# EAGLE board untitled (EAGLE 6.4)
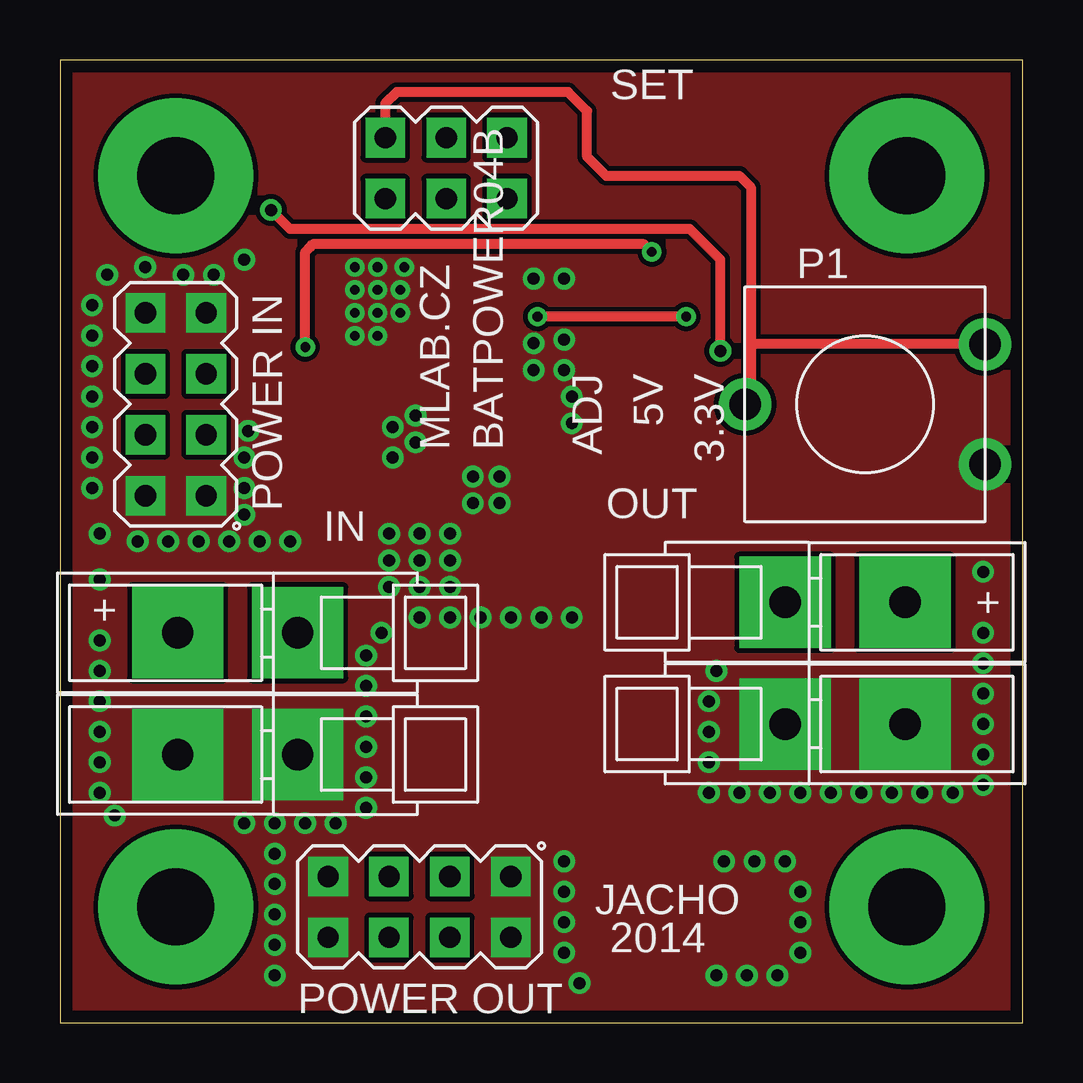
[diagram p0: board, top side]
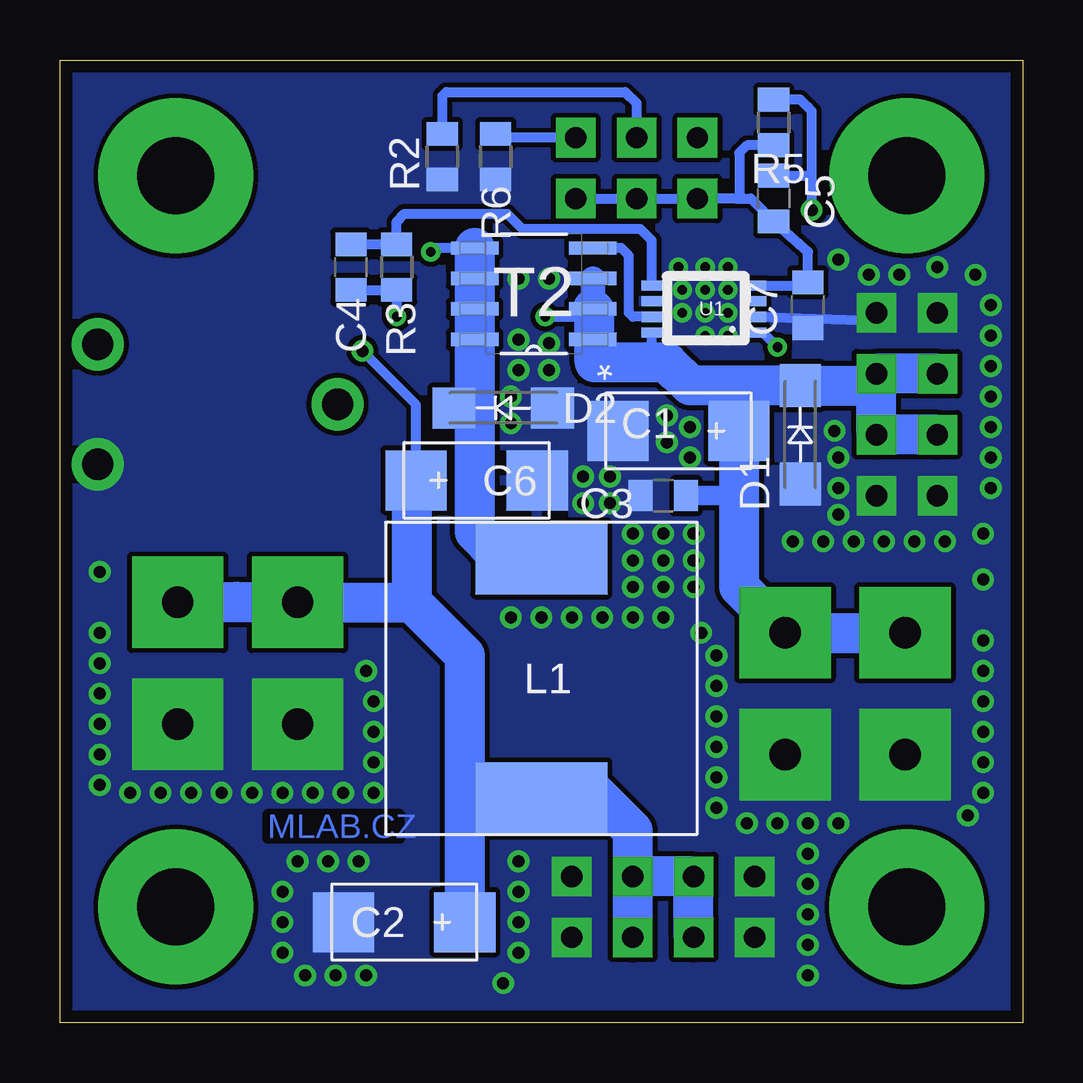
[diagram p1: board, bottom side, seen from below]

Size 40.13 x 40.13 mm. Coordinates in mm from the lower left corner, seen from the top.
Outline: 0,0 40.13,0 40.13,40.13 0,40.13 0,0
Copper layers (1*16): Top 0.035mm / dielectric 1.5mm / Bottom 0.035mm
Design rules "jacho35": minimum track width 8mil, minimum drill 16mil, track to track 8mil, track to pad 8mil, pad to pad 8mil, via to via 8mil, smd to smd 8mil, copper to edge 20mil, drill to drill 8mil, minimum pad ring 10mil, minimum via ring 8mil, stop-mask expansion 4mil, vias tented up to drill 25mil, thermal gap 0mil

## Footprints (pad centres in the part's own frame; a part is rotated, then mirrored left to right if it is on the bottom)
C = smd 2.55 x 2.5: + 2.525,0; - -2.525,0
C0805 = smd 0.991 x 1.295: 1 -0.95,0; 2 0.95,0
SMA = smd 1.8 x 1.7: A -2.05,0; K 2.05,0
DE1205-10 = smd 3 x 5.5: P$1 -5,0; P$2 5,0
TRIM_CA9MTV10 = drill 1.3 pad 2.184: 1 -2.5,-5; 2 0,5; 3 2.5,-5
0805 = smd 0.991 x 1.295: 1 -0.95,0; 2 0.95,0
MA04-2 = drill 0.889 pad 1.651 square: 1 -3.81,-1.27; 2 -3.81,1.27; 3 -1.27,-1.27; 4 -1.27,1.27; 5 1.27,-1.27; 6 1.27,1.27; 7 3.81,-1.27; 8 3.81,1.27
WAGO256 = drill 1.3 pad 3.81 square: 1 2.54,0; A1 -2.46,0
MA03-2 = drill 0.889 pad 1.651 square: 1 -2.54,-1.27; 2 -2.54,1.27; 3 0,-1.27; 4 0,1.27; 5 2.54,-1.27; 6 2.54,1.27
SO8 = smd 1.981 x 0.559: 1 -2.464,1.905; 2 -2.464,0.635; 3 -2.464,-0.635; 4 -2.464,-1.905; 5 2.464,-1.905; 6 2.464,-0.635; 7 2.464,0.635; 8 2.464,1.905
MSOP-8 = smd 0.42 x 0.89: 1 -0.975,-1.95; 2 -0.325,-1.95; 3 0.325,-1.95; 4 0.975,-1.95; 5 0.975,2.375; 6 0.325,2.375; 7 -0.325,2.375; 8 -0.975,2.375
SROUB3M = drill 3.2 pad 6.452: P$1 0,0

## Placement (x,y rotation side)
C1  47u  [C]  14.35,24.67 0 bottom
C2  100u  [C]  25.78,4.19 0 bottom
C3  100n  [C0805]  14.99,21.97 0 bottom
C4  1n  [C0805]  28,31.5 270 bottom
C5  100p  [C0805]  10.38,34.35 90 bottom
C6  100u  [C]  22.76,22.61 180 bottom
C7  470p  [C0805]  8.95,29.91 90 bottom
D1  M4  [SMA]  9.27,24.51 90 bottom
D2  15MQ040N  [SMA]  21.65,25.62 180 bottom
L1  22u  [DE1205-10]  20.07,14.35 270 bottom
P1  [TRIM_CA9MTV10]  33.56,25.78 90 top
R2  20k  [0805]  24.19,36.1 90 bottom
R3  22k  [0805]  26.1,31.5 270 bottom
R5  33k  [0805]  10.38,37.53 90 bottom
R6  20k  [0805]  21.97,36.1 90 bottom
SV1  [MA04-2]  4.83,25.78 90 top
SV2  [MA04-2]  14.99,4.83 180 top
SV3  [WAGO256]  7.37,11.18 0 top
SV4  [WAGO256]  7.37,16.26 0 top
SV5  [WAGO256]  32.77,12.45 180 top
SV6  [WAGO256]  32.77,17.53 180 top
SW2  [MA03-2]  16.1,35.62 0 top
T2  IRF7416  [SO8]  20.38,30.38 180 bottom
U1  LM3485  [MSOP-8]  13.08,29.75 90 bottom
X1  SROUB3M  [SROUB3M]  4.83,4.83 0 top
X2  SROUB3M  [SROUB3M]  35.31,4.83 0 top
X3  SROUB3M  [SROUB3M]  4.83,35.31 0 top
X4  SROUB3M  [SROUB3M]  35.31,35.31 0 top

## Library data of the parts
C1-C7 = moje_C
D1 X1-X4 = moje
D2 = moje_diody
L1 = moje_L
P1 = moje_pot
R2 R3 R5 R6 = moje_R
SV1 SV2 = moje_hrebinky; OC_FARNELL: unknown; OC_NEWARK: unknown
SV3-SV6 = moje_konektory
SW2 = moje_hrebinky
T2 = moje_T
U1 = ciza_io

## Nets
GND: C1.- C2.- C3.1 C6.- C7.1 D1.A D2.A P1.1 R2.1 R6.1 SV1.1 SV1.2 SV1.7 SV1.8 SV2.1 SV2.2 SV2.7 SV2.8 SV3.1 SV3.A1 SV5.1 SV5.A1 U1.2 U1.6
N$1: T2.4 U1.7
N$2: C1.+ C3.2 C4.2 D1.K R3.2 SV1.3 SV1.4 SV1.5 SV1.6 SV4.1 SV4.A1 T2.1 T2.2 T2.3 U1.8
N$3: C5.1 C7.2 R5.1 SW2.1 SW2.3 SW2.5 U1.4
N$4: C4.1 R3.1 U1.5
N$5: C2.+ C5.2 C6.+ L1.P$2 R5.2 SV2.3 SV2.4 SV2.5 SV2.6 SV6.1 SV6.A1
N$6: D2.K L1.P$1 T2.5 T2.6 T2.7 T2.8 U1.1
N$10: R2.2 SW2.4
N$11: R6.2 SW2.6
N$12: P1.2 P1.3 SW2.2

## Tracks (layer width: path | path; a pad name or v marks a point on that pad's centre or on a via)
GND  (via drill 0.4, 0.5)
  Bottom 0.406: U1.2 6.1,29.27 SV1.7
  other vias: 21.02,31.02 6.41,31.18 7.68,31.81 5.14,31.18 1.33,28.64 38.48,18.8 38.48,16.26 38.48,14.99 38.48,13.72 38.48,12.45 38.48,11.18 38.48,9.91 37.21,9.59 35.94,9.59 34.67,9.59 33.4,9.59 32.13,9.59 30.86,9.59 29.59,9.59 28.32,9.59 27.05,9.59 27.05,10.86 27.05,12.13 27.05,13.4 27.37,14.67 1.65,18.48 1.65,15.94 1.65,14.67 1.65,13.4 1.65,12.13 1.65,10.86 1.65,9.59 2.29,8.64 7.68,8.32 8.95,8.32 10.22,8.32 11.49,8.32 12.76,8.95 12.76,10.22 12.76,11.49 12.76,12.76 12.76,14.03 12.76,15.3 13.4,16.26 16.26,16.89 17.53,16.89 18.8,16.89 20.07,16.89 21.34,16.89 14.99,16.89 3.24,20.07 4.51,20.07 5.78,20.07 7.05,20.07 8.32,20.07 9.59,20.07 17.21,22.76 13.87,24.83 13.87,23.56 13.72,20.38 14.99,20.38 16.26,20.38 3.56,31.5 1.97,31.18 1.33,29.91 8.95,7.05 8.95,5.78 8.95,4.51 8.95,3.24 8.95,1.97 21.02,6.73 27.69,6.73 28.96,6.73 30.23,6.73 30.86,5.46 30.86,4.19 30.86,2.92 29.91,1.97 28.64,1.97 27.37,1.97 19.75,27.21 21.02,27.21 17.21,21.65 21.02,28.48 1.65,20.38 1.33,27.37 1.33,26.1 1.33,24.83 1.33,23.56 1.33,22.29 21.02,5.46 21.02,4.19 21.02,2.92 21.65,1.65 19.75,31.02 19.75,28.32 13.72,19.27 14.99,19.27 16.26,19.27 13.72,18.16 14.99,18.16 16.26,18.16 7.84,24.67 7.68,23.56 7.68,22.29 7.68,21.18 14.19,29.59 12.29,31.5 13.24,31.5 14.35,31.5 14.19,30.54 12.29,30.54 13.24,30.54 12.29,29.59 13.24,29.59 14.83,25.3 14.83,24.19 18.32,22.76 18.32,21.65 21.34,26.1 21.34,24.99 12.29,28.64 13.24,28.64
  pour Bottom: -0.25,40.39 40.39,40.39 40.39,-0.25 -0.25,-0.25
  pour Top: 0.38,40.39 0.38,-0.25 40.39,-0.25 40.39,39.75
N$1
  Bottom 0.406: U1.7 16.25,29.42 16.41,29.59 16.41,31.97 16.73,32.29 T2.4
N$2  (via drill 0.4)
  Top 0.406: v26.1,29.43 v19.91,29.43
  Bottom 0.406: C1.+ 11.83,26.55 11.81,26.56 | 15.28,28.77 U1.8 15.46,27.37 | C4.2 R3.2 v26.1,29.43 | v19.91,29.43 18.24,29.43 T2.2
  Bottom 0.61: 11.81,26.56 11.83,26.55 | 9.91,26.56 13.72,26.72 14.81,26.72 15.46,27.37
  Bottom 0.813: C3.2 11.83,21.97
  Bottom 1.016: T2.2 T2.3
  Bottom 1.676: SV1.6 SV1.5 6.1,26.42 | SV1.4 SV1.3 6.1,26.42 | 6.1,26.42 6.24,26.56 D1.K 9.91,26.56 11.18,26.56 11.81,26.56 12.45,26.56 13.86,26.56 14.83,27.53 17.84,27.53 | C1.+ 11.83,21.97 11.83,18.81 11.83,18.18 SV4.1 SV4.A1 | 17.84,27.53 17.84,29.67 T2.2 | 17.84,27.53 17.84,28.4 T2.1
N$3
  Bottom 0.406: U1.4 9.56,30.72 C7.2 8.95,32.13 C5.1 11.33,34.35 11.65,34.35 | SW2.5 SW2.3 SW2.1 11.97,34.35 11.65,34.35 | R5.1 11.49,36.58 11.81,36.26 11.81,34.51 11.65,34.35
N$4
  Bottom 0.406: U1.5 15.46,32.6 15.94,33.08 20.86,33.08 21.49,33.72 25.78,33.72 26.1,33.4 R3.1 C4.1
N$5  (via drill 0.5)
  Top 0.406: v27.53,28 27.53,31.81 26.26,33.08 9.59,33.08 v8.79,33.88
  Bottom 0.406: C5.2 9.27,35.3 8.8,35.3 8.79,35.31 | 8.95,38.16 9.27,38.48 | 9.27,38.48 R5.2 | C6.+ 25.29,25.77 v27.53,28 | v8.79,33.88 8.79,35.31 | 8.79,35.31 8.79,38.01 9.27,38.48
  Bottom 1.676: C2.+ 23.26,9.91 | 23.26,9.91 23.26,11.19 23.26,13.73 23.26,15.32 25.22,17.29 | SV2.6 SV2.5 SV2.3 | SV2.4 SV2.3 | SV2.3 16.26,8 18.16,9.91 18.8,9.91 19.43,9.27 19.99,9.27 L1.P$2 22.7,9.35 23.26,9.91 | SV6.1 30.86,17.53 | 30.86,17.53 SV6.1 | 30.86,17.53 32.77,17.53 | 32.77,17.53 SV6.A1 | 32.78,17.54 32.77,17.53 | 30.88,17.54 30.86,17.53 | 25.22,17.29 25.46,17.53 | 25.46,17.53 25.46,22.46 C6.+ | SV6.1 25.46,17.53 | 25.46,17.53 25.22,17.29
N$6  (via drill 0.4)
  Top 0.406: v10.22,28.16 10.22,32.13 10.38,32.29 10.54,32.45 24.35,32.45 v24.67,32.13
  Bottom 0.406: U1.1 11,28.77 10.84,28.77 v10.22,28.16 | T2.5 23.01,32.29 24.51,32.29 v24.67,32.13
  Bottom 1.676: T2.5 T2.6 T2.7 T2.8 22.85,25.62 | 22.85,25.62 22.85,20.47 21.97,19.59 20.3,19.59 L1.P$1 | D2.K 22.85,25.62
N$10
  Bottom 0.406: R2.2 24.19,38.64 24.04,38.8 16.57,38.8 16.1,38.32 SW2.4
N$11
  Bottom 0.406: SW2.6 21.81,36.89 R6.2
N$12
  Top 0.406: 28.8,28.16 28.8,34.83 28.32,35.31 22.76,35.31 21.97,36.1 21.97,38.01 21.18,38.8 14.03,38.8 13.56,38.32 SW2.2 | 28.8,28.16 28.8,26.02 P1.2 | P1.3 28.92,28.28 28.8,28.16

## Text on the board
Bottom: MLAB.CZ
tPlace: SET | ADJ | 5V | 3.3V | MLAB.CZ | BATPOWER04B | POWER IN | IN | OUT | + | + | JACHO | 2014 | POWER OUT